# Altium PCB PCB FINAL VERSION.pcbdoc
Units mm, origin at the board's own origin, x right, y up, seen from the top; angles counter-clockwise.
Board outline 109.98 x 65.02 mm, 2 copper layers (Top Layer, Bottom Layer); 32 components, 39 nets, 110 pads, 0 vias.
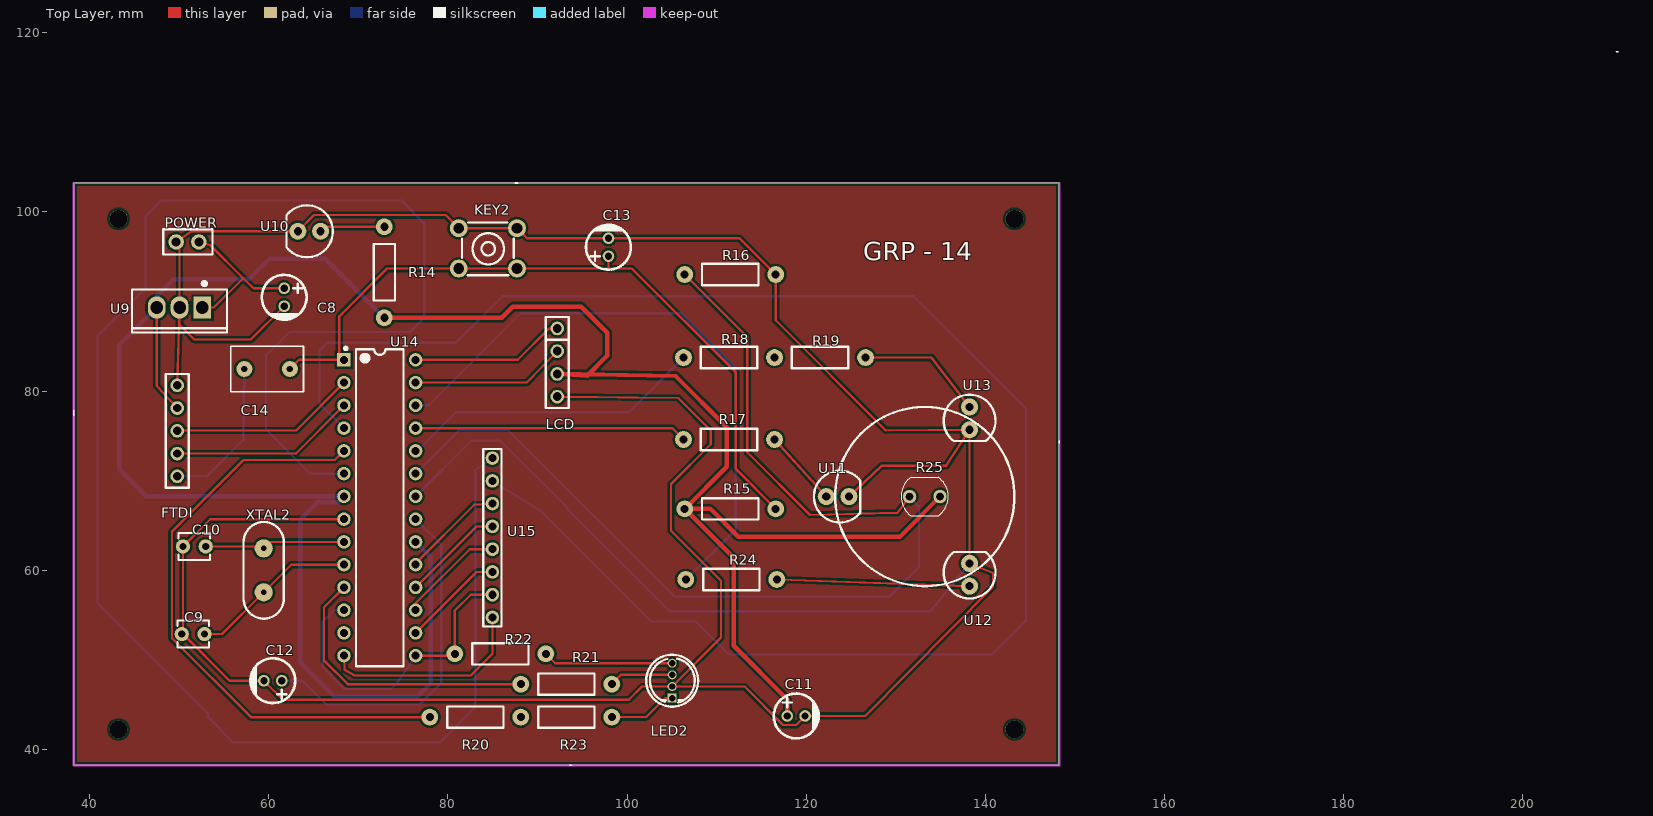
[diagram p0: Top Layer view]
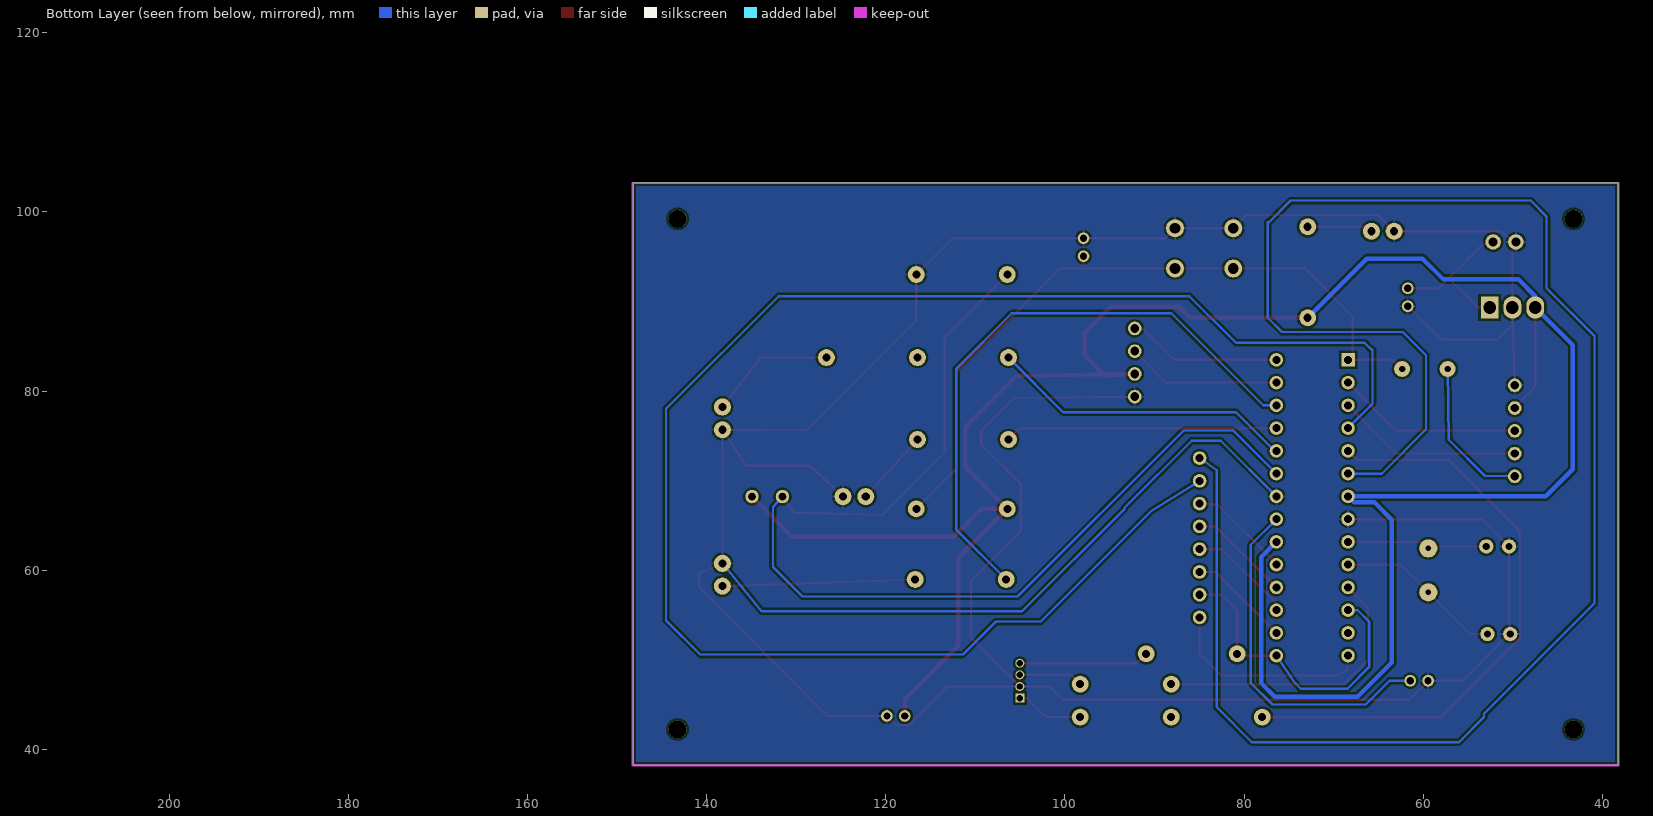
[diagram p1: Bottom Layer view, seen from below]

## Layer stack, top to bottom
Top Solder: solder mask 0.0102, Solder Resist, Dk 3.5
Top Layer: signal copper 0.0356
Dielectric1: dielectric 0.32, FR-4, Dk 4.8
Bottom Layer: signal copper 0.0356
Bottom Solder: solder mask 0.0102, Solder Resist, Dk 3.5

## Board outline
148.209,38.227 38.227,38.227 38.227,103.251 148.209,103.251

## Design rules (kind name [scope] priority, off if disabled: settings)
Clearance [All] p1: gap=0.254 ignorepadtopadclearanceinfootprint=FALSE except(0: Arc-Hole Track-Hole SMDPad-Hole THPad-Hole Via-Hole Fill-Hole Poly-Hole Region-Hole Text-Hole)
PolygonConnect [All] p1: connectstyle=Relief reliefconductorwidth=0.254 reliefentries=4 polygonreliefangle="90 Angle" airgapwidth=0.254
RoutingVias [All] p1: holewidth=0.711 width=1.27 viastyle="Through Hole" minholewidth=0.711 minwidth=1.27 maxholewidth=0.711 maxwidth=1.27
SolderMaskExpansion [All] p1: expansion=0.102 istentingtop=FALSE
Width [All] p1: maxlimit=0.254 minlimit=0.254 preferedwidth=0.254
30 further rules are at their usual default settings.

## Components (designator, comment, footprint, x,y, rotation, side; value= is the part's Value field where it differs from the comment)
C8 "330nF" CAP-TH_BD5.0-P2.00-D0.8-FD 61.722,90.472 r270 top
C9 "22pF" CAP-TH_L3.5-W3.0-P2.54-D0.8 51.562,52.88 r0 top
C10 "22pF" CAP-TH_L3.5-W3.0-P2.54-D0.8 51.689,62.659 r0 top
C11 "100nF" CAP-TH_BD5.0-P2.00-D0.8-FD 118.872,43.736 r0 top
C12 "100nF" CAP-TH_BD5.0-P2.00-D0.8-FD 60.452,47.673 r180 top
C13 "100nF" CAP-TH_BD5.0-P2.00-D0.8-FD 97.917,96.06 r90 top
C14 "100nF" RAD-0.2 59.817,82.471 r0 top
FTDI "Male Header 1*5P" "MALE HEADER 5P" 49.784,70.485 r180 top
KEY2 "RST_BTN" KEY-TH_4P-L6.0-W6.0-P4.50 84.455,95.933 r180 top
LCD "Header-Male-2.54_1x4" MALE_HEADER_4_PIN 92.202,83.185 r270 top
LED2 "φ5 RGB Transparent" LED-TH_4P-BD5.8-P1.30 105.029,47.673 r270 top
POWER "2 Pin Male Header" 1X2/2.54_MALE_PIN_HEADER 50.927,95.377 r180 top
R14 "330Ω" AXIAL-0.4 72.898,93.266 r90 top
R15 "10K" AXIAL-0.4 111.506,66.85 r180 top
R16 "1K" AXIAL-0.4 111.506,93.012 r0 top
R17 "330Ω" AXIAL-0.4 111.379,74.597 r0 top
R18 "330Ω" AXIAL-0.4 111.379,83.741 r0 top
R19 "330Ω" AXIAL-0.4 121.539,83.741 r0 top
R20 "330Ω" AXIAL-0.4 83.058,43.609 r0 top
R21 "330Ω" AXIAL-0.4 93.218,47.292 r0 top
R22 "330Ω" AXIAL-0.4 85.852,50.673 r0 top
R23 "330Ω" AXIAL-0.4 93.218,43.609 r0 top
R24 "330Ω" AXIAL-0.4 111.633,58.976 r0 top
R25 "LDR07" RESISTOR_LDR_5.1X4.3_RM3.4 133.227,68.227 r0 top
U9 "7805_Regulator" TO-220-3_L10.0-W4.5-P2.54-L 50.038,89.329 r180 top
U10 "LED" "5MM LED" 65.786,97.838 r180 top
U11 "GREEN_LED" "5MM LED" 122.227,68.227 r0 top
U12 "BLUE_LED" "5MM LED" 138.227,58.227 r90 top
U13 "RED_LED" "5MM LED" 138.227,78.227 r270 top
U14 "ATMEGA _328P-PU" DIP-28_L34.6-W7.3-P2.54-LS10.2-BL 72.39,66.977 r270 top
U15 "8 pin Male header" "8 PIN MALE HEADER PCB" 84.963,72.517 r180 top
XTAL2 "16MHz" "16MHZ_OSC [PCB]" 59.436,59.992 r0 top

## Footprints (in the part's own frame and the unit in brackets; to place one, negate y for a bottom-side part, rotate by r counter-clockwise, add the part's x,y. Pads: shape width x height; smd on the part's side, far side on the other; paste and mask are expansions set on the pad)
1X2/2.54_MALE_PIN_HEADER [mil]
  round 67.99 hole 40: 1(-50,-50) 2(50,-50)
  silkscreen extent -109,-106 107,6
"5MM LED" [mm]
  round 1.9 hole 0.914: 1(0,0) 2(2.54,0)
  silkscreen extent -1.37,-2.9 3.81,2.9
"8 PIN MALE HEADER PCB" [mil]
  round 60 hole 36: 1(0,700) 2(0,600) 3(0,500) 4(0,400) 5(0,300) 6(0,200) 7(0,100) 8(0,0)
  silkscreen extent -40,-40 40,740
"16MHZ_OSC [PCB]" [mil]
  round 80 hole 25: 1(0,96.46) 2(0,-96.46)
  silkscreen extent -88,-212 88,212
AXIAL-0.4 [mil]
  round 74 hole 35.4: 1(-200,0) 2(200,0)
  silkscreen extent -124,-47 124,47
CAP-TH_BD5.0-P2.00-D0.8-FD [mm]
  round 1.3 hole 0.8: 1(-1,0) 2(1,0)
  silkscreen extent -2.5,-2.5 2.5,2.5
CAP-TH_L3.5-W3.0-P2.54-D0.8 [mm]
  round 1.6 hole 0.8: 1(-1.27,0) 2(1.27,0)
  silkscreen extent -1.75,-1.5 1.75,1.5
DIP-28_L34.6-W7.3-P2.54-LS10.2-BL [mm]
  rect 1.5x1.5 hole 0.9: 1(-16.51,-4)
  round 1.5 hole 0.9: 2(-13.97,-4) 3(-11.43,-4) 4(-8.89,-4) 5(-6.35,-4) 6(-3.81,-4) 7(-1.27,-4) 8(1.27,-4) 9(3.81,-4) 10(6.35,-4) 11(8.89,-4) 12(11.43,-4) 13(13.97,-4) 14(16.51,-4) 15(16.51,4) 16(13.97,4) 17(11.43,4) 18(8.89,4) 19(6.35,4) 20(3.81,4) 21(1.27,4) 22(-1.27,4) 23(-3.81,4) 24(-6.35,4) 25(-8.89,4) 26(-11.43,4) 27(-13.97,4) 28(-16.51,4)
  silkscreen extent -17.94,-3.95 17.7,2.65
KEY-TH_4P-L6.0-W6.0-P4.50 [mm]
  round 2 hole 1.2: 1(-3.25,-2.25) 2(3.25,-2.25) 3(3.25,2.25) 4(-3.25,2.25)
  silkscreen extent -2.9,-2.9 2.9,3
LED-TH_4P-BD5.8-P1.30 [mm]
  rect 1x1 hole 0.7: 1(1.95,0)
  round 1 hole 0.7: 2(0.65,0) 3(-0.65,0) 4(-1.95,0)
  silkscreen extent -2.9,-2.9 2.9,2.9
"MALE HEADER 5P" [mil]
  round 60 hole 36: 1(0,0) 2(0,-100) 3(0,-200) 4(0,-300) 5(0,-400)
  silkscreen extent -50,-450 50,50
MALE_HEADER_4_PIN [mil]
  round 60 hole 39.37: 1(-150,0) 2(-50,0) 3(50,0) 4(150,0)
  silkscreen extent -200,-50 200,50
RAD-0.2 [mil]
  round 70 hole 28: 1(100,0) 2(-100,0)
  silkscreen extent -160,-100 160,100
RESISTOR_LDR_5.1X4.3_RM3.4 [mm]
  round 1.5 hole 0.8 slot 0.805 at 0 deg: 1(-1.7,0) 2(1.701,0)
  silkscreen extent -2.65,-2.15 2.62,2.17
TO-220-3_L10.0-W4.5-P2.54-L [mm]
  rect 2x2.5 hole 1.4: 1(-2.54,0)
  oval 2x2.5 hole 1.4: 2(0,0) 3(2.54,0)
  silkscreen extent -5.3,-2.86 5.3,2.8

## Free pads (board coordinates)
  round 2 hole 2 unplated: ""(43.227,42.227) ""(43.227,99.227) ""(143.227,42.227) ""(143.227,99.227)

## Nets (pads, with @x,y where several pads share a name; then routed paths per layer and width w, separated by ;. In a path a pad name is that pad's centre, name@x,y a point inside that pad or via, vN(x,y) a via of type N, cw(c..) or ccw(c..) an arc to the next point about the centre after c; other vN are vias at no path point)
1: U14.18 U15.5 | length 11.4
  Top Layer w0.254: U14.18 83.2,64.897 U15.5
2: U14.19 U15.6 | length 11.4
  Top Layer w0.254: U14.19 76.39,60.769 82.931,67.31 U15.6
3: U14.4 U15.7 | length 188.8
  Bottom Layer w0.254: U14.4 65.659,78.598 65.659,84.63 65.786,84.63 66.548,85.392 80.899,85.392 86.106,90.599 131.953,90.599 144.526,78.026 144.526,54.404 140.716,50.594 111.379,50.594 107.696,54.277 102.697,54.277 90.383,66.591 U15.7
4: U14.6 U15.8 | length 207.2
  Bottom Layer w0.254: U14.6@68.389,70.785 64.643,70.785 59.69,75.738 59.69,83.993 62.293,86.596 75.755,86.596 77.343,88.184 77.343,98.852 77.216,98.852 74.803,101.265 48.006,101.265 46.228,99.487 46.228,91.486 40.894,86.152 40.894,56.307 53.213,43.988 53.213,43.607 56.007,40.813 79.144,40.813 83.058,44.727 83.058,71.166 U15.8 U15.8@84.501,72.055
5V: C11.1 FTDI.4 LCD.3 R14.1 R15.2 R25.2 U9.3 U14.7 U14.20 | length 272.1
  Top Layer w0.254: U9.3@47.498,89.328 47.498,80.565 FTDI.4
  Top Layer w0.5: R14.1@72.898,88.185 86.002,88.185 87.249,89.432 94.869,89.432 97.79,86.511 97.79,83.971 95.547,81.728 LCD.3 105.41,81.685 111.125,75.97 111.125,71.548 R15.2@106.426,66.849 ; C11.1 117.872,45.577 111.887,51.562 111.887,61.389 R15.2 109.299,66.85 112.395,63.754 130.454,63.754 R25.2
  Bottom Layer w0.5: U9.3@47.498,89.328 43.307,85.137 43.307,71.271 46.332,68.246 68.389,68.246 67.754,67.611 65.474,67.611 63.5,65.637 63.5,49.704 67.333,45.871 76.558,45.871 78.105,47.418 78.105,61.451 U14.20@76.391,63.166 ; U9.3 47.498,90.599 49.403,92.504 57.785,92.504 60.071,94.79 66.294,94.79 R14.1
A: U14.14 U15.1 | length 23.3
  Top Layer w0.254: U14.14 68.453,48.895 69.596,48.26 82.55,48.26 84.963,50.673 U15.1
B: R22.1 U14.12 U14.15 U15.2 | length 35.4
  Top Layer w0.254: U14.15 80.566,50.467 R22.1 80.772,55.499 82.55,57.277 U15.2
  Bottom Layer w0.254: U14.12 67.31,55.547 66.04,54.277 66.04,49.197 68.453,46.784 73.66,46.784 74.422,47.546 U14.15
BLUE: R24.1 U14.26 | length 68.4
  Bottom Layer w0.254: U14.26 77.851,78.407 88.138,88.694 105.918,88.694 112.141,82.471 112.141,64.564 R24.1
C: U14.16 U15.3 | length 11.4
  Top Layer w0.254: U14.16 83.2,59.817 U15.3
C5_2: C14.2 FTDI.1 | length 16.9
  Bottom Layer w0.254: FTDI.1 53.11,70.533 57.15,74.573 C14.2
D: U14.17 U15.4 | length 11.8
  Top Layer w0.254: U14.17 76.39,56.324 82.423,62.357 U15.4
G: R21.1 U14.11 | length 32.1
  Top Layer w0.254: U14.11@68.389,58.086 66.167,55.863 66.167,49.935 68.811,47.291 R21.1@88.138,47.291
GND: C8.2 C9.1 C10.1 C11.2 C12.2 C13.2 FTDI.5 KEY2.1 KEY2.2 LCD.4 LED2.2 POWER.2 R16.2 U9.2 U10.2 U11.2 U12.2 U13.2 U14.8 U14.22 | length 430.9
  Top Layer w0.254: FTDI.5 49.982,87.402 U9.2 ; C8.2 57.999,85.749 51.689,85.749 50.038,87.4 U9.2 ; U14.8 53.467,65.707 C10.1 50.419,52.88 55.626,47.673 C12.2 61.575,45.552 100.193,45.552 101.663,47.023 LED2.2 113.124,47.023 117.411,42.735 118.872,42.735 C11.2 126.586,43.736 140.843,58.166 140.843,59.69 U12.2 U13.2 ; LCD.4 105.707,79.229 109.347,75.589 109.347,74.065 104.902,69.62 104.902,64.413 110.49,58.825 110.49,52.483 LED2.2@105.029,47.022 ; R16.2@116.586,93.011 116.586,87.908 128.882,75.612 U13.2 ; R16.2 112.537,97.061 C13.2 88.829,97.061 KEY2.1 81.206,98.183 79.743,99.646 65.054,99.646 U10.2 51.328,97.838 POWER.2 50.038,96.078 U9.2 ; U11.2 128.397,71.652 135.612,71.652 U13.2
  Top Layer w0.26: C9.1 C9.1@50.419,52.88
  Bottom Layer w0.254: U14.22 82.613,74.47 85.852,74.47 93.345,66.977 93.345,66.85 104.775,55.42 133.858,55.42 U12.2
GREEN: R17.1 U14.25 | length 30.4
  Top Layer w0.254: U14.25 105.029,75.867 R17.1
LDR: R16.1 R25.1 U14.23 | length 120.2
  Top Layer w0.254: R16.1@106.426,93.01 113.411,86.025 113.411,73.175 120.419,66.167 130.175,66.421 R25.1
  Bottom Layer w0.254: U14.23 81.216,75.613 86.741,75.613 105.283,57.071 129.286,57.071 132.588,60.373 132.588,67.056 R25.1
R: R20.1 U14.5 | length 67.3
  Top Layer w0.254: U14.5@68.389,73.326 67.371,72.307 57.17,72.307 49.192,64.329 49.192,52.422 58.006,43.608 R20.1@77.978,43.608
R2_2: R24.2 U12.1 | length 21.5
  Top Layer w0.254: R24.2 U12.1
R3_2: R14.2 U10.1 | length 7.3
  Top Layer w0.254: U10.1 66.294,98.346 R14.2
R9_1: R18.2 R19.1
R11_2: LED2.3 R21.2 | length 7.2
  Top Layer w0.254: R21.2 99.329,48.323 LED2.3
R12_2: LED2.4 R22.2 | length 14.5
  Top Layer w0.254: R22.2 91.981,49.624 LED2.4
R13_1: R20.2 R23.1
R13_2: LED2.1 R23.2 | length 7.6
  Top Layer w0.254: R23.2 102.123,43.609 104.237,45.722
  Top Layer w0.26: 104.237,45.722 LED2.1
RED: R18.1 U14.24 | length 34.2
  Bottom Layer w0.254: U14.24 76.581,73.327 80.899,77.645 100.203,77.645 R18.1
RESET: C13.1 C14.1 KEY2.3 KEY2.4 R15.1 U14.1 | length 81
  Top Layer w0.254: C14.1 63.373,83.487 67.348,83.487 U14.1@67.869,83.487 ; U14.1@67.869,83.486 67.869,88.34 73.21,93.681 KEY2.3@81.206,93.681 ; KEY2.3@81.206,93.683 KEY2.4 97.917,93.683 C13.1 ; 97.917,93.681 100.526,93.681 112.141,82.066 112.141,71.294 R15.1@116.586,66.849
  Top Layer w0.26: U14.1@67.869,83.487 U14.1
RX: FTDI.3 U14.2 | length 20.8
  Top Layer w0.254: FTDI.3 63.055,75.613 U14.2
S$1303: 
S$1308: 
S$1310: 
S$1312: 
SCL: LCD.1 U14.28 | length 17.3
  Top Layer w0.254: U14.28 87.78,83.487 91.288,86.995 LCD.1
SDA: LCD.2 U14.27 | length 17.3
  Top Layer w0.254: U14.27 88.793,80.947 LCD.2
TX: FTDI.2 U14.3 | length 20.8
  Top Layer w0.254: FTDI.2 63.055,73.073 U14.3
U1_9: C10.2 U14.9 XTAL2.1 | length 15.8
  Top Layer w0.254: C10.2 59.22,62.659 XTAL2.1 60.16,63.167 U14.9
U1_10: C9.2 U14.10 XTAL2.2 | length 18.8
  Top Layer w0.254: C9.2 54.775,52.88 XTAL2.2 62.522,60.627 U14.10
U1_21: C12.1 U14.21 | length 39.4
  Bottom Layer w0.254: C12.1 63.754,47.673 66.421,45.006 76.835,45.006 79.248,47.419 79.248,62.849 U14.21
U6_1: R17.2 U11.1 | length 8.6
  Top Layer w0.254: R17.2 U11.1
U8_1: R19.2 U13.1 | length 14.3
  Top Layer w0.254: R19.2 133.985,83.741 U13.1
VCC: C8.1 POWER.1 U9.1 | length 17.5
  Top Layer w0.254: POWER.1 53.447,96.314 57.153,92.608 ; U9.1 53.871,89.329 57.153,92.608 ; C8.1 58.29,91.473 57.153,92.608
pads on no net: U14.13

## Polygon pours and split planes (outlines as drawn)
GND on Bottom Layer "GND_L02_P001" (solid, pour order 1): 38.227,103.227 38.227,38.227 148.227,38.227 148.227,103.227
no net on Top Layer "NONET_L01_P000" (solid, pour order 0): 38.227,103.227 38.227,38.227 148.227,38.227 148.227,103.227

## Keep-outs
Keep-Out Layer:
  lines w0.254: 38.227,38.227 148.227,38.227 148.227,103.227 38.227,103.227 38.227,38.227

## Silkscreen, mask and mechanical layers (free items; w line width, h text height)
Top Overlay:
  circle w0.254: c133.227,68.227 r10
  lines w0.2: 38.227,77.343 38.227,77.827 ; 87.503,103.227 87.757,103.227 ; 93.626,38.227 93.826,38.227 ; 148.227,74.222 148.227,74.422 ; 210.439,117.883 210.639,117.883
  text "GRP - 14" at 126.365,94.615 h2.03